# Altium PCB Coil_v3r1.PcbDoc (part 2 of 5)
Units mm, origin at the board's own origin, x right, y up, seen from the top; angles counter-clockwise.
Board outline 72 x 72 mm, 4 copper layers (Top Layer, Signal Layer 1, Signal Layer 2, Bottom Layer), stack 0.778 mm thick; 2 components, 0 nets, 15 pads, 374 vias.
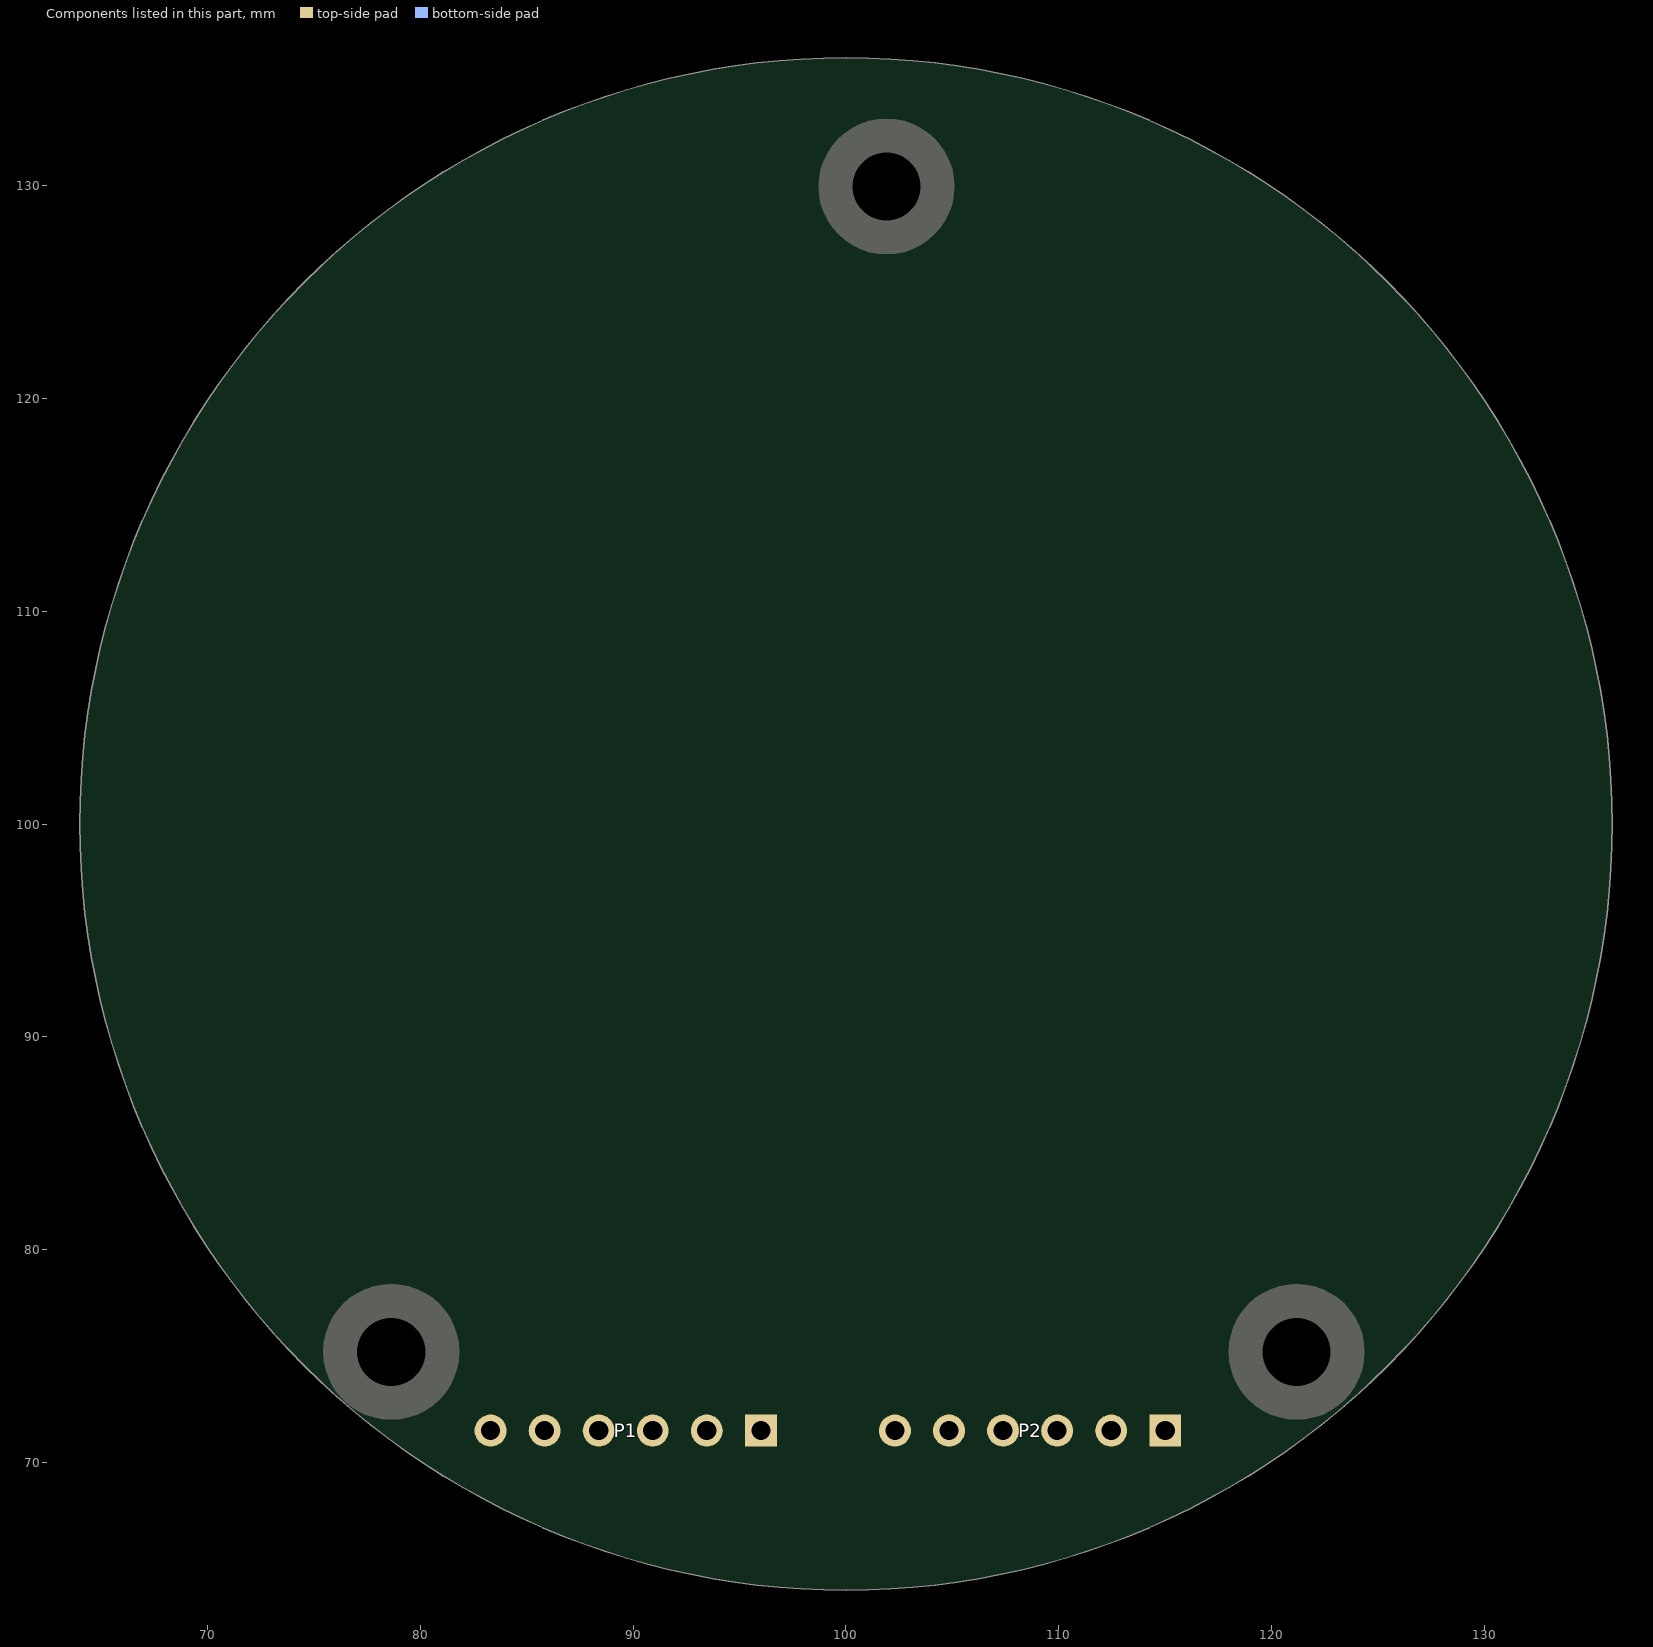
[diagram p4: the components of this part, seen from the top]

## Via types
v1: diameter 0.406, hole 0.305, Top Layer to Bottom Layer, 374 vias

## Nets (pads, with @x,y where several pads share a name; then routed paths per layer and width w, separated by ;. In a path a pad name is that pad's centre, name@x,y a point inside that pad or via, vN(x,y) a via of type N, cw(c..) or ccw(c..) an arc to the next point about the centre after c; other vN are vias at no path point) (continued)
copper on no net: (continued)
  Signal Layer 1 w0.1: v1(76.079,98.825) 76.089,98.982 76.136,99.141 76.218,99.299 76.335,99.458 76.485,99.615 76.667,99.771 76.878,99.924 77.117,100.075 77.38,100.222 77.665,100.365 77.969,100.505 78.288,100.64 78.618,100.77 78.957,100.896 79.3,101.017 79.644,101.134 79.984,101.246 80.318,101.355 80.642,101.46 80.951,101.562 81.244,101.662 81.516,101.759 81.766,101.856 81.99,101.953 82.185,102.049 82.351,102.147 82.486,102.248 82.587,102.35 82.655,102.457 v1(82.689,102.568) ; v1(76.079,101.175) 76.105,101.331 76.167,101.484 76.264,101.634 76.396,101.78 76.561,101.922 76.757,102.059 76.982,102.191 77.235,102.317 77.511,102.438 77.809,102.553 78.125,102.662 78.455,102.765 78.797,102.862 79.146,102.954 79.499,103.041 79.853,103.123 80.203,103.202 80.546,103.277 80.878,103.35 81.196,103.421 81.497,103.492 81.778,103.563 82.036,103.634 82.268,103.709 82.472,103.786 82.647,103.867 82.79,103.953 82.902,104.046 82.98,104.145 v1(83.024,104.252) ; v1(76.309,96.486) 76.304,96.643 76.335,96.806 76.401,96.972 76.502,97.141 76.636,97.312 76.802,97.485 76.997,97.658 77.22,97.832 77.468,98.004 77.737,98.175 78.026,98.343 78.33,98.508 78.646,98.671 78.97,98.829 79.3,98.983 79.631,99.133 79.959,99.278 80.28,99.419 80.592,99.555 80.89,99.687 81.172,99.815 81.433,99.939 81.672,100.06 81.885,100.178 82.07,100.293 82.226,100.407 82.35,100.52 82.441,100.632 82.498,100.745 v1(82.521,100.859) ; v1(76.309,103.514) 76.35,103.666 76.427,103.813 76.538,103.952 76.684,104.085 76.862,104.21 77.071,104.327 77.308,104.437 77.571,104.538 77.858,104.631 78.166,104.716 78.491,104.793 78.83,104.863 79.179,104.927 79.536,104.984 79.896,105.036 80.256,105.083 80.612,105.127 80.961,105.168 81.298,105.208 81.622,105.248 81.929,105.289 82.215,105.332 82.478,105.378 82.717,105.429 82.928,105.485 83.109,105.549 83.261,105.621 83.381,105.702 83.468,105.793 v1(83.523,105.896) ; v1(76.768,94.181) 76.747,94.337 76.762,94.501 76.812,94.673 76.896,94.851 77.012,95.035 77.16,95.223 77.338,95.415 77.542,95.609 77.772,95.805 78.023,96.001 78.294,96.197 78.58,96.392 78.879,96.584 79.187,96.773 79.499,96.959 79.814,97.141 80.126,97.317 80.432,97.489 80.729,97.655 81.013,97.816 81.28,97.971 81.528,98.12 81.754,98.263 81.955,98.401 82.128,98.535 82.272,98.663 82.384,98.787 82.463,98.908 82.509,99.026 v1(82.521,99.141) ; v1(76.768,105.819) 76.823,105.967 76.914,106.105 77.039,106.233 77.197,106.351 77.386,106.458 77.605,106.554 77.852,106.639 78.124,106.714 78.419,106.779 78.733,106.833 79.064,106.878 79.408,106.915 79.763,106.944 80.123,106.966 80.486,106.982 80.849,106.994 81.208,107.003 81.559,107.01 81.899,107.016 82.225,107.024 82.534,107.035 82.823,107.049 83.09,107.069 83.332,107.097 83.547,107.132 83.735,107.178 83.892,107.235 84.02,107.304 84.116,107.386 v1(84.18,107.482) ; v1(77.45,91.931) 77.414,92.085 77.413,92.25 77.446,92.426 77.511,92.612 77.609,92.806 77.738,93.008 77.896,93.216 78.081,93.429 78.29,93.646 78.521,93.866 78.771,94.088 79.037,94.309 79.316,94.53 79.603,94.749 79.896,94.964 80.191,95.176 80.484,95.382 80.772,95.583 81.051,95.778 81.318,95.965 81.569,96.145 81.802,96.318 82.012,96.483 82.198,96.64 82.358,96.79 82.488,96.932 82.588,97.067 82.655,97.195 82.689,97.316 v1(82.689,97.432) ; v1(77.45,108.069) 77.52,108.21 77.624,108.338 77.76,108.454 77.929,108.555 78.128,108.643 78.355,108.717 78.61,108.778 78.888,108.826 79.187,108.861 79.505,108.885 79.839,108.897 80.185,108.9 80.541,108.894 80.902,108.88 81.265,108.861 81.627,108.837 81.985,108.811 82.335,108.784 82.674,108.757 82.999,108.733 83.308,108.713 83.597,108.699 83.864,108.693 84.108,108.696 84.326,108.711 84.517,108.738 84.679,108.779 84.812,108.835 84.916,108.907 v1(84.99,108.997) ; v1(78.349,89.76) 78.299,89.909 78.281,90.074 78.297,90.252 78.344,90.443 78.422,90.646 78.531,90.859 78.667,91.082 78.83,91.312 79.017,91.549 79.226,91.791 79.453,92.035 79.696,92.282 79.951,92.529 80.216,92.775 80.486,93.018 80.759,93.257 81.031,93.492 81.298,93.72 81.557,93.941 81.804,94.153 82.036,94.357 82.25,94.552 82.444,94.737 82.613,94.912 82.757,95.076 82.873,95.23 82.959,95.374 83.013,95.508 83.036,95.632 v1(83.024,95.748) ; v1(78.349,110.24) 78.433,110.374 78.549,110.492 78.696,110.593 78.874,110.677 79.08,110.745 79.314,110.797 79.573,110.833 79.854,110.853 80.156,110.859 80.475,110.851 80.808,110.83 81.153,110.799 81.506,110.758 81.864,110.71 82.224,110.655 82.582,110.596 82.935,110.534 83.281,110.473 83.616,110.413 83.937,110.357 84.242,110.307 84.528,110.265 84.794,110.233 85.037,110.212 85.255,110.205 85.448,110.213 85.613,110.238 85.751,110.281 85.862,110.343 v1(85.944,110.425) ; v1(79.457,87.687) 79.392,87.831 79.359,87.993 79.357,88.171 79.385,88.366 79.443,88.576 79.53,88.799 79.644,89.034 79.784,89.279 79.947,89.533 80.13,89.794 80.332,90.06 80.55,90.329 80.78,90.6 81.019,90.87 81.265,91.139 81.513,91.404 81.76,91.664 82.004,91.917 82.239,92.162 82.464,92.398 82.675,92.624 82.87,92.839 83.044,93.041 83.196,93.232 83.323,93.41 83.423,93.574 83.494,93.726 83.536,93.865 83.545,93.991 v1(83.523,94.104) ; v1(79.457,112.313) 79.554,112.438 79.68,112.544 79.837,112.63 80.022,112.697 80.234,112.744 80.472,112.773 80.733,112.783 81.015,112.775 81.316,112.751 81.633,112.712 81.962,112.659 82.302,112.594 82.65,112.519 83.001,112.436 83.354,112.346 83.704,112.252 84.05,112.156 84.388,112.061 84.715,111.969 85.029,111.881 85.328,111.802 85.609,111.732 85.87,111.674 86.11,111.63 86.326,111.601 86.519,111.591 86.686,111.599 86.828,111.628 86.944,111.679 v1(87.033,111.752) ; v1(80.763,85.733) 80.684,85.87 80.635,86.027 80.615,86.205 80.625,86.402 80.662,86.616 80.727,86.846 80.817,87.091 80.932,87.349 81.069,87.618 81.226,87.895 81.402,88.18 81.592,88.469 81.794,88.761 82.006,89.054 82.224,89.345 82.444,89.633 82.665,89.916 82.882,90.192 83.093,90.459 83.294,90.716 83.482,90.961 83.654,91.194 83.808,91.413 83.94,91.617 84.049,91.807 84.133,91.98 84.189,92.138 84.216,92.28 84.214,92.407 v1(84.18,92.518) ; v1(80.763,114.267) 80.871,114.382 81.008,114.475 81.172,114.545 81.363,114.594 81.579,114.62 81.818,114.625 82.079,114.61 82.359,114.575 82.656,114.521 82.967,114.451 83.29,114.366 83.622,114.269 83.96,114.16 84.302,114.042 84.644,113.918 84.984,113.79 85.318,113.661 85.645,113.533 85.962,113.409 86.266,113.292 86.556,113.183 86.828,113.086 87.082,113.002 87.316,112.935 87.529,112.886 87.72,112.856 87.887,112.848 88.031,112.863 88.151,112.902 v1(88.248,112.967) ; v1(82.254,83.916) 82.163,84.044 82.098,84.196 82.061,84.371 82.051,84.568 82.067,84.785 82.109,85.021 82.175,85.273 82.264,85.541 82.374,85.822 82.503,86.114 82.65,86.414 82.81,86.72 82.983,87.031 83.165,87.343 83.354,87.654 83.545,87.962 83.737,88.265 83.926,88.561 84.11,88.848 84.284,89.123 84.447,89.386 84.596,89.634 84.727,89.867 84.839,90.084 84.929,90.283 84.995,90.464 85.036,90.626 85.049,90.77 85.034,90.896 v1(84.99,91.003) ; v1(82.254,116.084) 82.373,116.188 82.518,116.267 82.688,116.321 82.883,116.35 83.1,116.355 83.339,116.337 83.597,116.296 83.872,116.234 84.163,116.151 84.466,116.051 84.779,115.935 85.099,115.805 85.425,115.664 85.754,115.513 86.082,115.356 86.407,115.196 86.728,115.034 87.041,114.875 87.344,114.721 87.635,114.574 87.912,114.437 88.174,114.314 88.419,114.206 88.645,114.116 88.852,114.046 89.039,113.998 89.205,113.974 89.349,113.975 89.473,114.002 v1(89.575,114.056) ; 83.3,71.5 85.841,74.041 97.956,74.041 98.815,74.9 98.815,76.079 ; v1(83.916,82.254) 83.812,82.373 83.733,82.518 83.679,82.688 83.65,82.883 83.645,83.1 83.663,83.339 83.704,83.597 83.766,83.872 83.849,84.163 83.949,84.466 84.065,84.779 84.195,85.099 84.336,85.425 84.487,85.754 84.644,86.082 84.804,86.407 84.966,86.728 85.125,87.041 85.279,87.344 85.426,87.635 85.563,87.912 85.686,88.174 85.794,88.419 85.884,88.645 85.954,88.852 86.002,89.039 86.026,89.205 86.025,89.349 85.998,89.473 v1(85.944,89.575) ; v1(83.916,117.746) 84.044,117.837 84.196,117.902 84.371,117.939 84.568,117.949 84.785,117.933 85.021,117.891 85.273,117.825 85.541,117.736 85.822,117.626 86.114,117.497 86.414,117.35 86.72,117.19 87.031,117.017 87.343,116.835 87.654,116.646 87.962,116.455 88.265,116.263 88.561,116.074 88.848,115.89 89.123,115.716 89.386,115.553 89.634,115.404 89.867,115.273 90.084,115.161 90.283,115.071 90.464,115.005 90.626,114.964 90.77,114.951 90.896,114.966 v1(91.003,115.01) ; v1(85.733,80.763) 85.618,80.871 85.525,81.008 85.455,81.172 85.406,81.363 85.38,81.579 85.375,81.818 85.39,82.079 85.425,82.359 85.479,82.656 85.549,82.967 85.634,83.29 85.731,83.622 85.84,83.96 85.958,84.302 86.082,84.644 86.21,84.984 86.339,85.318 86.467,85.645 86.591,85.962 86.708,86.266 86.817,86.556 86.914,86.828 86.998,87.082 87.065,87.316 87.114,87.529 87.144,87.72 87.152,87.887 87.137,88.031 87.098,88.151 v1(87.033,88.248) ; v1(85.733,119.237) 85.87,119.316 86.027,119.365 86.205,119.385 86.402,119.375 86.616,119.338 86.846,119.273 87.091,119.183 87.349,119.068 87.618,118.931 87.895,118.774 88.18,118.598 88.469,118.408 88.761,118.206 89.054,117.994 89.345,117.776 89.633,117.556 89.916,117.335 90.192,117.118 90.459,116.907 90.716,116.706 90.961,116.518 91.194,116.346 91.413,116.192 91.617,116.06 91.807,115.951 91.98,115.867 92.138,115.811 92.28,115.784 92.407,115.786 v1(92.518,115.82) ; v1(86.269,99.28) 86.281,99.377 86.328,99.475 86.41,99.573 86.524,99.671 86.671,99.767 86.848,99.862 87.053,99.955 87.284,100.044 87.539,100.13 87.814,100.213 88.107,100.291 88.415,100.364 88.734,100.433 89.06,100.497 89.39,100.556 89.72,100.611 90.047,100.661 90.367,100.707 90.676,100.75 90.972,100.79 91.251,100.827 91.51,100.862 91.746,100.897 91.957,100.931 92.14,100.965 92.295,101.001 92.418,101.039 92.509,101.079 92.567,101.124 v1(92.592,101.173) ; v1(86.269,100.72) 86.291,100.814 86.348,100.907 86.439,100.996 86.564,101.081 86.719,101.162 86.905,101.238 87.119,101.308 87.358,101.373 87.621,101.432 87.903,101.485 88.203,101.532 88.517,101.573 88.841,101.608 89.171,101.638 89.506,101.662 89.84,101.682 90.17,101.698 90.493,101.711 90.806,101.721 91.104,101.729 91.385,101.737 91.646,101.745 91.885,101.755 92.098,101.766 92.284,101.781 92.441,101.801 92.568,101.825 92.663,101.857 92.726,101.895 v1(92.756,101.941) ; v1(86.419,97.849) 86.422,97.946 86.458,98.049 86.529,98.155 86.632,98.264 86.768,98.375 86.934,98.488 87.128,98.602 87.349,98.715 87.593,98.827 87.859,98.938 88.142,99.046 88.44,99.151 88.75,99.253 89.068,99.35 89.39,99.444 89.712,99.533 90.032,99.617 90.345,99.697 90.649,99.771 90.939,99.842 91.212,99.908 91.466,99.97 91.697,100.029 91.904,100.085 92.083,100.138 92.232,100.19 92.351,100.24 92.437,100.291 92.491,100.341 v1(92.51,100.393) ; v1(86.419,102.151) 86.452,102.243 86.518,102.329 86.618,102.408 86.75,102.48 86.914,102.544 87.106,102.6 87.326,102.648 87.571,102.687 87.838,102.718 88.125,102.742 88.428,102.757 88.744,102.765 89.07,102.766 89.402,102.761 89.737,102.75 90.071,102.735 90.402,102.716 90.724,102.695 91.036,102.672 91.333,102.65 91.614,102.628 91.875,102.609 92.113,102.593 92.326,102.583 92.513,102.578 92.671,102.581 92.799,102.592 92.897,102.613 92.964,102.645 v1(92.998,102.688) ; v1(86.719,96.441) 86.711,96.538 86.736,96.644 86.795,96.757 86.887,96.876 87.01,97.001 87.164,97.131 87.345,97.264 87.553,97.4 87.784,97.537 88.036,97.675 88.307,97.812 88.593,97.947 88.89,98.081 89.195,98.211 89.506,98.338 89.817,98.46 90.127,98.577 90.43,98.689 90.724,98.795 91.005,98.896 91.27,98.99 91.516,99.078 91.74,99.161 91.939,99.238 92.111,99.31 92.255,99.377 92.368,99.44 92.448,99.498 92.496,99.554 v1(92.51,99.607) ; v1(86.719,103.559) 86.76,103.647 86.835,103.725 86.943,103.793 87.082,103.851 87.251,103.898 87.449,103.933 87.672,103.958 87.92,103.972 88.189,103.975 88.476,103.968 88.779,103.951 89.095,103.926 89.419,103.893 89.749,103.853 90.081,103.808 90.412,103.758 90.738,103.704 91.057,103.65 91.364,103.595 91.658,103.541 91.935,103.49 92.192,103.444 92.427,103.403 92.638,103.371 92.823,103.347 92.981,103.333 93.11,103.331 93.209,103.341 93.279,103.366 v1(93.317,103.405) ; v1(87.163,95.072) 87.145,95.168 87.16,95.276 87.207,95.394 87.286,95.523 87.395,95.66 87.534,95.805 87.7,95.956 87.893,96.113 88.108,96.273 88.345,96.437 88.6,96.601 88.87,96.766 89.151,96.93 89.442,97.092 89.737,97.25 90.034,97.404 90.33,97.553 90.62,97.696 90.901,97.832 91.17,97.961 91.423,98.083 91.659,98.197 91.873,98.302 92.063,98.4 92.227,98.489 92.362,98.571 92.468,98.645 92.542,98.712 92.584,98.772 v1(92.592,98.827) ; v1(87.163,104.928) 87.214,105.011 87.297,105.081 87.411,105.138 87.555,105.18 87.728,105.209 87.929,105.224 88.154,105.225 88.401,105.213 88.669,105.188 88.954,105.151 89.254,105.103 89.565,105.045 89.884,104.978 90.208,104.904 90.533,104.824 90.857,104.739 91.176,104.652 91.487,104.565 91.787,104.478 92.074,104.394 92.344,104.314 92.595,104.241 92.824,104.176 93.031,104.122 93.212,104.078 93.368,104.048 93.496,104.033 93.596,104.033 93.667,104.05 v1(93.71,104.085) ; v1(87.687,79.457) 87.562,79.554 87.456,79.68 87.37,79.837 87.303,80.022 87.256,80.234 87.227,80.472 87.217,80.733 87.225,81.015 87.249,81.316 87.288,81.633 87.341,81.962 87.406,82.302 87.481,82.65 87.564,83.001 87.654,83.354 87.748,83.704 87.844,84.05 87.939,84.388 88.031,84.715 88.119,85.029 88.198,85.328 88.268,85.609 88.326,85.87 88.37,86.11 88.399,86.326 88.409,86.519 88.401,86.686 88.372,86.828 88.321,86.944 v1(88.248,87.033) ; v1(87.687,120.543) 87.831,120.608 87.993,120.641 88.171,120.643 88.366,120.615 88.576,120.557 88.799,120.47 89.034,120.356 89.279,120.216 89.533,120.053 89.794,119.87 90.06,119.668 90.329,119.45 90.6,119.22 90.87,118.981 91.139,118.735 91.404,118.487 91.664,118.24 91.917,117.996 92.162,117.761 92.398,117.536 92.624,117.325 92.839,117.13 93.041,116.956 93.232,116.804 93.41,116.677 93.574,116.577 93.726,116.506 93.865,116.464 93.991,116.455 v1(94.104,116.477) ; v1(87.749,93.758) 87.721,93.851 87.724,93.959 87.758,94.082 87.823,94.218 87.918,94.366 88.041,94.525 88.19,94.693 88.365,94.869 88.563,95.051 88.781,95.238 89.017,95.428 89.269,95.621 89.532,95.813 89.803,96.004 90.081,96.192 90.36,96.377 90.638,96.556 90.912,96.728 91.177,96.893 91.431,97.05 91.671,97.197 91.893,97.335 92.095,97.462 92.274,97.579 92.427,97.685 92.554,97.78 92.651,97.865 92.718,97.939 92.753,98.004 v1(92.756,98.059) ; v1(87.749,106.242) 87.808,106.32 87.897,106.381 88.017,106.425 88.165,106.453 88.34,106.463 88.541,106.457 88.765,106.434 89.01,106.396 89.274,106.344 89.553,106.277 89.846,106.198 90.149,106.108 90.459,106.008 90.774,105.9 91.089,105.787 91.402,105.669 91.711,105.549 92.011,105.429 92.3,105.312 92.576,105.198 92.837,105.091 93.078,104.992 93.3,104.904 93.5,104.828 93.676,104.766 93.827,104.719 93.953,104.691 94.052,104.68 94.125,104.69 v1(94.171,104.72) ; v1(88.468,92.511) 88.431,92.601 88.423,92.709 88.444,92.835 88.494,92.977 88.573,93.134 88.679,93.304 88.81,93.487 88.965,93.68 89.143,93.882 89.341,94.091 89.555,94.305 89.785,94.523 90.027,94.742 90.277,94.96 90.533,95.176 90.792,95.389 91.05,95.596 91.304,95.796 91.55,95.988 91.787,96.17 92.009,96.342 92.216,96.502 92.403,96.649 92.569,96.784 92.711,96.906 92.826,97.014 92.914,97.108 92.973,97.189 93.001,97.257 v1(92.998,97.312) ; v1(88.468,107.489) 88.535,107.56 88.631,107.611 88.754,107.643 88.904,107.654 89.08,107.647 89.278,107.619 89.499,107.574 89.739,107.51 89.995,107.43 90.267,107.335 90.55,107.225 90.842,107.104 91.14,106.972 91.441,106.833 91.743,106.687 92.042,106.537 92.336,106.385 92.622,106.235 92.898,106.087 93.16,105.946 93.408,105.812 93.638,105.688 93.849,105.577 94.04,105.481 94.209,105.401 94.354,105.339 94.476,105.297 94.574,105.276 94.648,105.278 v1(94.697,105.303) ; v1(89.314,91.347) 89.267,91.432 89.248,91.539 89.256,91.666 89.291,91.813 89.353,91.977 89.44,92.158 89.552,92.353 89.686,92.562 89.842,92.781 90.017,93.01 90.208,93.245 90.414,93.485 90.631,93.728 90.857,93.971 91.089,94.213 91.324,94.452 91.559,94.684 91.791,94.91 92.016,95.127 92.232,95.332 92.436,95.526 92.624,95.707 92.795,95.874 92.946,96.025 93.074,96.161 93.178,96.28 93.255,96.384 93.305,96.47 93.326,96.541 v1(93.317,96.595) ; v1(89.314,108.653) 89.388,108.717 89.489,108.758 89.615,108.776 89.765,108.772 89.939,108.746 90.134,108.698 90.348,108.63 90.58,108.542 90.827,108.435 91.087,108.312 91.357,108.174 91.634,108.022 91.917,107.86 92.202,107.69 92.487,107.513 92.769,107.333 93.046,107.151 93.314,106.972 93.573,106.796 93.819,106.628 94.051,106.469 94.268,106.322 94.466,106.189 94.645,106.074 94.805,105.976 94.943,105.9 95.06,105.845 95.155,105.815 95.229,105.809 v1(95.28,105.829) ; v1(89.575,85.944) 89.657,85.862 89.719,85.751 89.762,85.613 89.787,85.448 89.795,85.255 89.788,85.037 89.767,84.794 89.735,84.528 89.693,84.242 89.643,83.937 89.587,83.616 89.527,83.281 89.466,82.935 89.404,82.582 89.345,82.224 89.29,81.864 89.242,81.506 89.201,81.153 89.17,80.808 89.149,80.475 89.141,80.156 89.147,79.854 89.167,79.573 89.203,79.314 89.255,79.08 89.323,78.874 89.407,78.696 89.508,78.549 89.626,78.433 v1(89.76,78.349) ; v1(89.76,121.651) 89.909,121.701 90.074,121.719 90.252,121.703 90.443,121.656 90.646,121.578 90.859,121.469 91.082,121.333 91.312,121.17 91.549,120.983 91.791,120.774 92.035,120.547 92.282,120.304 92.529,120.049 92.775,119.784 93.018,119.513 93.257,119.241 93.492,118.969 93.72,118.702 93.941,118.443 94.153,118.196 94.357,117.964 94.552,117.75 94.737,117.556 94.912,117.387 95.076,117.243 95.23,117.127 95.374,117.041 95.508,116.987 95.632,116.964 v1(95.748,116.976) ; v1(90.277,90.277) 90.222,90.357 90.191,90.462 90.186,90.589 90.206,90.738 90.25,90.908 90.318,91.097 90.409,91.303 90.521,91.524 90.652,91.759 90.802,92.004 90.968,92.258 91.147,92.519 91.338,92.783 91.537,93.049 91.743,93.313 91.952,93.575 92.161,93.831 92.368,94.08 92.569,94.319 92.762,94.546 92.945,94.76 93.113,94.96 93.266,95.143 93.4,95.31 93.513,95.458 93.604,95.588 93.67,95.698 93.711,95.79 93.724,95.862 v1(93.71,95.915) ; v1(90.277,109.723) 90.357,109.778 90.462,109.809 90.589,109.814 90.738,109.794 90.908,109.75 91.097,109.682 91.303,109.591 91.524,109.479 91.759,109.348 92.004,109.198 92.258,109.032 92.519,108.853 92.783,108.662 93.049,108.463 93.313,108.257 93.575,108.048 93.831,107.839 94.08,107.632 94.319,107.431 94.546,107.238 94.76,107.055 94.96,106.887 95.143,106.734 95.31,106.6 95.458,106.487 95.588,106.396 95.698,106.33 95.79,106.289 95.862,106.276 v1(95.915,106.29) ; 90.92,71.5 92.57,69.85 97.949,69.85 101.185,73.086 101.185,76.079 ; v1(91.003,84.99) 91.093,84.916 91.165,84.812 91.221,84.679 91.262,84.517 91.289,84.326 91.304,84.108 91.307,83.864 91.301,83.597 91.287,83.308 91.267,82.999 91.243,82.674 91.216,82.335 91.189,81.985 91.163,81.627 91.139,81.265 91.12,80.902 91.106,80.541 91.1,80.185 91.103,79.839 91.115,79.505 91.139,79.187 91.174,78.888 91.222,78.61 91.283,78.355 91.357,78.128 91.445,77.929 91.546,77.76 91.662,77.624 91.79,77.52 v1(91.931,77.45) ; v1(91.347,89.314) 91.283,89.388 91.242,89.489 91.224,89.615 91.228,89.765 91.254,89.939 91.302,90.134 91.37,90.348 91.458,90.58 91.565,90.827 91.688,91.087 91.826,91.357 91.978,91.634 92.14,91.917 92.31,92.202 92.487,92.487 92.667,92.769 92.849,93.046 93.028,93.314 93.204,93.573 93.372,93.819 93.531,94.051 93.678,94.268 93.811,94.466 93.926,94.645 94.024,94.805 94.1,94.943 94.155,95.06 94.185,95.155 94.191,95.229 v1(94.171,95.28) ; v1(91.347,110.686) 91.432,110.733 91.539,110.752 91.666,110.744 91.813,110.709 91.977,110.647 92.158,110.56 92.353,110.448 92.562,110.314 92.781,110.158 93.01,109.983 93.245,109.792 93.485,109.586 93.728,109.369 93.971,109.143 94.213,108.911 94.452,108.676 94.684,108.441 94.91,108.209 95.127,107.984 95.332,107.768 95.526,107.564 95.707,107.376 95.874,107.205 96.025,107.054 96.161,106.926 96.28,106.822 96.384,106.745 96.47,106.695 96.541,106.674 v1(96.595,106.683) ; v1(91.931,122.55) 92.085,122.586 92.25,122.587 92.426,122.554 92.612,122.489 92.806,122.391 93.008,122.262 93.216,122.104 93.429,121.919 93.646,121.71 93.866,121.479 94.088,121.229 94.309,120.963 94.53,120.684 94.749,120.397 94.964,120.104 95.176,119.809 95.382,119.516 95.583,119.228 95.778,118.949 95.965,118.682 96.145,118.431 96.318,118.198 96.483,117.988 96.64,117.802 96.79,117.642 96.932,117.512 97.067,117.412 97.195,117.345 97.316,117.311 v1(97.432,117.311) ; v1(92.511,88.468) 92.44,88.535 92.389,88.631 92.357,88.754 92.346,88.904 92.353,89.08 92.381,89.278 92.426,89.499 92.49,89.739 92.57,89.995 92.665,90.267 92.775,90.55 92.896,90.842 93.028,91.14 93.167,91.441 93.313,91.743 93.463,92.042 93.615,92.336 93.765,92.622 93.913,92.898 94.054,93.16 94.188,93.408 94.312,93.638 94.423,93.849 94.519,94.04 94.599,94.209 94.661,94.354 94.703,94.476 94.724,94.574 94.722,94.648 v1(94.697,94.697) ; v1(92.511,111.532) 92.601,111.569 92.709,111.577 92.835,111.556 92.977,111.506 93.134,111.427 93.304,111.321 93.487,111.19 93.68,111.035 93.882,110.857 94.091,110.659 94.305,110.445 94.523,110.215 94.742,109.973 94.96,109.723 95.176,109.467 95.389,109.208 95.596,108.95 95.796,108.696 95.988,108.45 96.17,108.213 96.342,107.991 96.502,107.784 96.649,107.597 96.784,107.431 96.906,107.289 97.014,107.174 97.108,107.086 97.189,107.027 97.257,106.999 v1(97.312,107.002) ; v1(92.518,84.18) 92.614,84.116 92.696,84.02 92.765,83.892 92.822,83.735 92.868,83.547 92.903,83.332 92.931,83.09 92.951,82.823 92.965,82.534 92.976,82.225 92.984,81.899 92.99,81.559 92.997,81.208 93.006,80.849 93.018,80.486 93.034,80.123 93.056,79.763 93.085,79.408 93.122,79.064 93.167,78.733 93.221,78.419 93.286,78.124 93.361,77.852 93.446,77.605 93.542,77.386 93.649,77.197 93.767,77.039 93.895,76.914 94.033,76.823 v1(94.181,76.768) ; v1(93.758,87.749) 93.68,87.808 93.619,87.897 93.575,88.017 93.547,88.165 93.537,88.34 93.543,88.541 93.566,88.765 93.604,89.01 93.656,89.274 93.723,89.553 93.802,89.846 93.892,90.149 93.992,90.459 94.1,90.774 94.213,91.089 94.331,91.402 94.451,91.711 94.571,92.011 94.688,92.3 94.802,92.576 94.909,92.837 95.008,93.078 95.096,93.3 95.172,93.5 95.234,93.676 95.281,93.827 95.309,93.953 95.32,94.052 95.31,94.125 v1(95.28,94.171) ; v1(93.758,112.251) 93.851,112.279 93.959,112.276 94.082,112.242 94.218,112.177 94.366,112.082 94.525,111.959 94.693,111.81 94.869,111.635 95.051,111.437 95.238,111.219 95.428,110.983 95.621,110.731 95.813,110.468 96.004,110.197 96.192,109.919 96.377,109.64 96.556,109.362 96.728,109.088 96.893,108.823 97.05,108.569 97.197,108.329 97.335,108.107 97.462,107.905 97.579,107.726 97.685,107.573 97.78,107.446 97.865,107.349 97.939,107.282 98.004,107.247 v1(98.059,107.244) ; v1(94.104,83.523) 94.207,83.468 94.298,83.381 94.379,83.261 94.451,83.109 94.515,82.928 94.571,82.717 94.622,82.478 94.668,82.215 94.711,81.929 94.752,81.622 94.792,81.298 94.832,80.961 94.873,80.612 94.917,80.256 94.964,79.896 95.016,79.536 95.073,79.179 95.137,78.83 95.207,78.491 95.284,78.166 95.369,77.858 95.462,77.571 95.563,77.308 95.673,77.071 95.79,76.862 95.915,76.684 96.048,76.538 96.187,76.427 96.334,76.35 v1(96.486,76.309) ; v1(94.181,123.232) 94.337,123.253 94.501,123.238 94.673,123.188 94.851,123.104 95.035,122.988 95.223,122.84 95.415,122.662 95.609,122.458 95.805,122.228 96.001,121.977 96.197,121.706 96.392,121.42 96.584,121.121 96.773,120.813 96.959,120.501 97.141,120.186 97.317,119.874 97.489,119.568 97.655,119.271 97.816,118.987 97.971,118.72 98.12,118.472 98.263,118.246 98.401,118.045 98.535,117.872 98.663,117.728 98.787,117.616 98.908,117.537 99.026,117.491 v1(99.141,117.479) ; v1(95.072,87.163) 94.989,87.214 94.919,87.297 94.862,87.411 94.82,87.555 94.791,87.728 94.776,87.929 94.775,88.154 94.787,88.401 94.812,88.669 94.849,88.954 94.897,89.254 94.955,89.565 95.022,89.884 95.096,90.208 95.176,90.533 95.261,90.857 95.348,91.176 95.435,91.487 95.522,91.787 95.606,92.074 95.686,92.344 95.759,92.595 95.824,92.824 95.878,93.031 95.922,93.212 95.952,93.368 95.967,93.496 95.967,93.596 95.95,93.667 v1(95.915,93.71) ; v1(95.072,112.837) 95.168,112.855 95.276,112.84 95.394,112.793 95.523,112.714 95.66,112.605 95.805,112.466 95.956,112.3 96.113,112.107 96.273,111.892 96.437,111.655 96.601,111.4 96.766,111.13 96.93,110.849 97.092,110.558 97.25,110.263 97.404,109.966 97.553,109.67 97.696,109.38 97.832,109.099 97.961,108.83 98.083,108.577 98.197,108.341 98.302,108.127 98.4,107.937 98.489,107.773 98.571,107.638 98.645,107.532 98.712,107.458 98.772,107.416 v1(98.827,107.408) ; v1(95.748,83.024) 95.855,82.98 95.954,82.902 96.047,82.79 96.133,82.647 96.214,82.472 96.291,82.268 96.366,82.036 96.437,81.778 96.508,81.497 96.579,81.196 96.65,80.878 96.723,80.546 96.798,80.203 96.877,79.853 96.959,79.499 97.046,79.146 97.138,78.797 97.235,78.455 97.338,78.125 97.447,77.809 97.562,77.511 97.683,77.235 97.809,76.982 97.941,76.757 98.078,76.561 98.22,76.396 98.366,76.264 98.516,76.167 98.669,76.105 98.825,76.079 ; v1(96.441,86.719) 96.353,86.76 96.275,86.835 96.207,86.943 96.149,87.082 96.102,87.251 96.067,87.449 96.042,87.672 96.028,87.92 96.025,88.189 96.032,88.476 96.049,88.779 96.074,89.095 96.107,89.419 96.147,89.749 96.192,90.081 96.242,90.412 96.296,90.738 96.35,91.057 96.405,91.364 96.459,91.658 96.51,91.935 96.556,92.192 96.597,92.427 96.629,92.638 96.653,92.823 96.667,92.981 96.669,93.11 96.659,93.209 96.634,93.279 v1(96.595,93.317) ; v1(96.441,113.281) 96.538,113.289 96.644,113.264 96.757,113.205 96.876,113.113 97.001,112.99 97.131,112.836 97.264,112.655 97.4,112.447 97.537,112.216 97.675,111.964 97.812,111.693 97.947,111.407 98.081,111.11 98.211,110.805 98.338,110.494 98.46,110.183 98.577,109.873 98.689,109.57 98.795,109.276 98.896,108.995 98.99,108.73 99.078,108.484 99.161,108.26 99.238,108.061 99.31,107.889 99.377,107.745 99.44,107.632 99.498,107.552 99.554,107.504 v1(99.607,107.49) ; v1(96.486,123.691) 96.643,123.696 96.806,123.665 96.972,123.599 97.141,123.498 97.312,123.364 97.485,123.198 97.658,123.003 97.832,122.78 98.004,122.532 98.175,122.263 98.343,121.974 98.508,121.67 98.671,121.354 98.829,121.03 98.983,120.7 99.133,120.369 99.278,120.041 99.419,119.72 99.555,119.408 99.687,119.11 99.815,118.828 99.939,118.567 100.06,118.328 100.178,118.115 100.293,117.93 100.407,117.774 100.52,117.65 100.632,117.559 100.745,117.502 v1(100.859,117.479) ; v1(97.312,92.998) 97.355,92.964 97.387,92.897 97.408,92.799 97.419,92.671 97.422,92.513 97.417,92.326 97.407,92.113 97.391,91.875 97.372,91.614 97.35,91.333 97.328,91.036 97.305,90.724 97.284,90.402 97.265,90.071 97.25,89.737 97.239,89.402 97.234,89.07 97.235,88.744 97.243,88.428 97.258,88.125 97.282,87.838 97.313,87.571 97.352,87.326 97.4,87.106 97.456,86.914 97.52,86.75 97.592,86.618 97.671,86.518 97.757,86.452 v1(97.849,86.419) ; v1(97.432,82.689) 97.543,82.655 97.65,82.587 97.752,82.486 97.853,82.351 97.951,82.185 98.047,81.99 98.144,81.766 98.241,81.516 98.338,81.244 98.438,80.951 98.54,80.642 98.645,80.318 98.754,79.984 98.866,79.644 98.983,79.3 99.104,78.957 99.23,78.618 99.36,78.288 99.495,77.969 99.635,77.665 99.778,77.38 99.925,77.117 100.076,76.878 100.229,76.667 100.385,76.485 100.542,76.335 100.701,76.218 100.859,76.136 101.018,76.089 101.175,76.079 ; v1(97.849,113.581) 97.946,113.578 98.049,113.542 98.155,113.471 98.264,113.368 98.375,113.232 98.488,113.066 98.602,112.872 98.715,112.651 98.827,112.407 98.938,112.141 99.046,111.858 99.151,111.56 99.253,111.25 99.35,110.932 99.444,110.61 99.533,110.288 99.617,109.968 99.697,109.655 99.771,109.351 99.842,109.061 99.908,108.788 99.97,108.534 100.029,108.303 100.085,108.096 100.138,107.917 100.19,107.768 100.24,107.649 100.291,107.563 100.341,107.509 v1(100.393,107.49) ; v1(98.059,92.756) 98.105,92.726 98.143,92.663 98.175,92.568 98.199,92.441 98.219,92.284 98.234,92.098 98.245,91.885 98.255,91.646 98.263,91.385 98.271,91.104 98.279,90.806 98.289,90.493 98.302,90.17 98.318,89.84 98.338,89.506 98.362,89.171 98.392,88.841 98.427,88.517 98.468,88.203 98.515,87.903 98.568,87.621 98.627,87.358 98.692,87.119 98.762,86.905 98.838,86.719 98.919,86.564 99.004,86.439 99.093,86.348 99.186,86.291 99.28,86.269 ; v1@98.815,124.121 98.88,124.121 98.945,124.115 99.011,124.102 99.077,124.083 99.142,124.058 99.208,124.027 ; v1(98.825,123.921) 98.889,123.921 98.954,123.915 99.019,123.903 99.084,123.885 99.149,123.86 99.215,123.83 99.28,123.794 99.345,123.752 99.41,123.704 99.475,123.65 99.54,123.591 99.605,123.526 99.669,123.456 99.733,123.38 99.797,123.3 99.86,123.214 99.923,123.124 99.985,123.029 100.047,122.93 100.108,122.826 100.169,122.719 100.229,122.607 100.288,122.492 100.347,122.374 100.405,122.252 100.462,122.127 100.518,122 100.574,121.87 100.629,121.737 100.684,121.603 v1(100.627,119.826) ; v1(98.827,92.592) 98.876,92.567 98.921,92.509 98.961,92.418 98.999,92.295 99.035,92.14 99.069,91.957 99.103,91.746 99.138,91.51 99.173,91.251 99.21,90.972 99.25,90.676 99.293,90.367 99.339,90.047 99.389,89.72 99.444,89.39 99.503,89.06 99.567,88.734 99.636,88.415 99.709,88.107 99.787,87.814 99.87,87.539 99.956,87.284 100.045,87.053 100.138,86.848 100.233,86.671 100.329,86.524 100.427,86.41 100.525,86.328 100.623,86.281 100.72,86.269 100.741,85.869 ccw(c102.04,85.869) 102.04,84.57 ccw(c103.19,84.57) 102.377,83.757 109.374,76.76 ccw(c110.706,78.091) 110.706,76.208 cw(c110.706,75.107) 111.485,75.885 113.58,75.885 116.622,72.843 116.622,70.254 116.367,70 110.073,70 109.92,70.153 109.92,71.5 ; v1(99.141,82.521) 99.255,82.498 99.368,82.441 99.48,82.35 99.593,82.226 99.707,82.07 99.822,81.885 99.94,81.672 100.061,81.433 100.185,81.172 100.313,80.89 100.445,80.592 100.581,80.28 100.722,79.959 100.867,79.631 101.017,79.3 101.171,78.97 101.329,78.646 101.492,78.33 101.657,78.026 101.825,77.737 101.996,77.468 102.168,77.22 102.342,76.997 102.515,76.802 102.688,76.636 102.859,76.502 103.028,76.401 103.194,76.335 103.357,76.304 v1(103.514,76.309) ; 99.259,86.269 99.259,83.437 ccw(c99.782,83.437) 99.782,82.915 100.741,81.174 102.686,77.438 104.879,75.6 104.879,74.573 102.3,71.993 102.3,71.5 ; v1(99.28,113.731) 99.32,113.73 99.361,113.723 99.401,113.71 99.442,113.691 99.483,113.666 99.524,113.635 99.565,113.598 99.606,113.556 99.646,113.507 99.687,113.454 99.727,113.394 99.767,113.329 99.807,113.259 99.847,113.184 99.886,113.104 99.924,113.019 99.962,112.929 100,112.835 100.037,112.736 100.074,112.633 100.109,112.527 100.144,112.417 100.179,112.303 100.213,112.186 100.246,112.065 100.278,111.942 100.309,111.817 100.34,111.689 100.37,111.559 v1(100.399,111.427) ; v1(99.607,92.51) 99.659,92.491 99.709,92.437 99.76,92.351 99.81,92.232 99.862,92.083 99.915,91.904 99.971,91.697 100.03,91.466 100.092,91.212 100.158,90.939 100.229,90.649 100.303,90.345 100.383,90.032 100.467,89.712 100.556,89.39 100.65,89.068 100.747,88.75 100.849,88.44 100.954,88.142 101.062,87.859 101.173,87.593 101.285,87.349 101.398,87.128 101.512,86.934 101.625,86.768 101.736,86.632 101.845,86.529 101.951,86.458 102.054,86.422 v1(102.151,86.419) ; v1(100.06,83.222) 100.408,82.461 102.872,77.828 105.094,75.879 105.289,75.684 105.289,73.684 104.84,73.235 104.84,71.5 ; v1(100.393,92.51) 100.446,92.496 100.502,92.448 100.56,92.368 100.623,92.255 100.69,92.111 100.762,91.939 100.839,91.74 100.922,91.516 101.01,91.27 101.104,91.005 101.205,90.724 101.311,90.43 101.423,90.127 101.54,89.817 101.662,89.506 101.789,89.195 101.919,88.89 102.053,88.593 102.188,88.307 102.325,88.036 102.463,87.784 102.6,87.553 102.736,87.345 102.869,87.164 102.999,87.01 103.124,86.887 103.243,86.795 103.356,86.736 103.462,86.711 v1(103.559,86.719) ; v1(100.685,109.792) 100.704,109.66 100.722,109.529 100.74,109.4 100.757,109.273 100.774,109.149 100.79,109.028 100.806,108.91 100.821,108.794 100.836,108.682 100.851,108.574 100.865,108.47 100.88,108.369 100.894,108.273 100.908,108.181 100.922,108.093 100.936,108.011 100.951,107.933 100.965,107.86 100.98,107.792 100.995,107.729 101.01,107.672 101.026,107.62 101.042,107.573 101.059,107.532 101.076,107.497 101.094,107.468 101.113,107.444 101.132,107.426 101.152,107.414 v1(101.173,107.408) ; v1(100.72,113.731) 100.759,113.726 100.799,113.715 100.838,113.698 100.876,113.674 100.914,113.645 100.952,113.61 100.989,113.569 101.025,113.523 101.06,113.47 101.095,113.413 101.129,113.349 101.162,113.281 101.194,113.207 101.226,113.128 101.256,113.044 101.285,112.955 101.314,112.862 101.342,112.764 101.368,112.663 101.394,112.557 101.418,112.447 101.442,112.333 101.464,112.217 101.485,112.097 101.506,111.974 101.525,111.848 101.543,111.72 101.56,111.589 101.576,111.457 v1(101.591,111.323) ; v1(100.859,82.521) 100.974,82.509 101.092,82.463 101.213,82.384 101.337,82.272 101.465,82.128 101.599,81.955 101.737,81.754 101.88,81.528 102.029,81.28 102.184,81.013 102.345,80.729 102.511,80.432 102.683,80.126 102.859,79.814 103.041,79.499 103.227,79.187 103.416,78.879 103.608,78.58 103.803,78.294 103.999,78.023 104.195,77.772 104.391,77.542 104.585,77.338 104.777,77.16 104.965,77.012 105.149,76.896 105.327,76.812 105.499,76.762 105.663,76.747 v1(105.819,76.768) ; v1@101,84 ccw(c103.237,84) 101.655,82.418 102.716,81.358 108.762,74 109.078,73.684 111.643,73.684 112.46,72.867 112.46,71.5 ; v1(101.173,92.592) 101.228,92.584 101.288,92.542 101.355,92.468 101.429,92.362 101.511,92.227 101.6,92.063 101.698,91.873 101.803,91.659 101.917,91.423 102.039,91.17 102.168,90.901 102.304,90.62 102.447,90.33 102.596,90.034 102.75,89.737 102.908,89.442 103.07,89.151 103.234,88.87 103.399,88.6 103.563,88.345 103.727,88.108 103.887,87.893 104.044,87.7 104.195,87.534 104.34,87.395 104.477,87.286 104.606,87.207 104.724,87.16 104.832,87.145 v1(104.928,87.163) ; v1(101.175,123.921) 101.239,123.915 101.303,123.903 101.367,123.884 101.43,123.86 101.492,123.829 101.554,123.792 101.616,123.75 101.676,123.701 101.737,123.647 101.796,123.587 101.855,123.522 101.913,123.451 101.97,123.375 102.026,123.294 102.081,123.207 102.136,123.116 102.19,123.02 102.242,122.92 102.294,122.815 102.345,122.706 102.395,122.593 102.443,122.476 102.491,122.356 102.538,122.232 102.584,122.105 102.629,121.975 102.672,121.843 102.715,121.708 102.757,121.571 102.798,121.432 v1(102.568,119.669) ; v1@101.185,124.121 101.25,124.115 101.314,124.102 101.378,124.083 101.442,124.058 101.505,124.026 ; v1(101.437,121.566) 101.319,119.792 101.363,119.656 101.407,119.522 101.449,119.39 101.492,119.26 101.534,119.133 101.575,119.008 101.616,118.887 101.657,118.769 101.698,118.654 101.738,118.542 101.778,118.435 101.818,118.331 101.857,118.231 101.897,118.136 101.937,118.046 101.976,117.96 102.016,117.879 102.056,117.803 102.096,117.731 102.136,117.666 102.177,117.605 102.218,117.55 102.26,117.5 102.302,117.456 102.345,117.417 102.388,117.384 102.432,117.357 102.476,117.336 102.522,117.32 v1(102.568,117.311) ; v1(101.705,109.667) 101.71,109.533 101.714,109.401 101.718,109.271 101.722,109.144 101.726,109.018 101.729,108.896 101.733,108.777 101.736,108.66 101.739,108.548 101.742,108.438 101.746,108.333 101.75,108.231 101.754,108.134 101.758,108.041 101.763,107.953 101.769,107.869 101.775,107.79 101.781,107.716 101.789,107.647 101.797,107.583 101.806,107.524 101.817,107.471 101.828,107.423 101.84,107.381 101.854,107.344 101.868,107.313 101.885,107.287 101.902,107.267 101.921,107.253 v1(101.941,107.244) ; v1(101.73,83.523) ccw(c103.585,83.523) 102.274,82.211 103.031,81.454 109.308,74 112.5,74 115,71.5 ; v1(101.941,92.756) 101.996,92.753 102.061,92.718 102.135,92.651 102.22,92.554 102.315,92.427 102.421,92.274 102.538,92.095 102.665,91.893 102.803,91.671 102.95,91.431 103.107,91.177 103.272,90.912 103.444,90.638 103.623,90.36 103.808,90.081 103.996,89.803 104.187,89.532 104.379,89.269 104.572,89.017 104.762,88.781 104.949,88.563 105.131,88.365 105.307,88.19 105.475,88.041 105.634,87.918 105.782,87.823 105.918,87.758 106.041,87.724 106.149,87.721 v1(106.242,87.749) ; v1(102.151,113.581) 102.243,113.548 102.329,113.482 102.408,113.382 102.48,113.25 102.544,113.086 102.6,112.894 102.648,112.674 102.687,112.429 102.718,112.162 102.742,111.875 102.757,111.572 102.765,111.256 102.766,110.93 102.761,110.598 102.75,110.263 102.735,109.929 102.716,109.598 102.695,109.276 102.672,108.964 102.65,108.667 102.628,108.386 102.609,108.125 102.593,107.887 102.583,107.674 102.578,107.487 102.581,107.329 102.592,107.201 102.613,107.103 102.645,107.036 v1(102.688,107.002) ; v1(102.568,82.689) 102.684,82.689 102.805,82.655 102.933,82.588 103.068,82.488 103.21,82.358 103.36,82.198 103.517,82.012 103.682,81.802 103.855,81.569 104.035,81.318 104.222,81.051 104.417,80.772 104.618,80.484 104.824,80.191 105.036,79.896 105.251,79.603 105.47,79.316 105.691,79.037 105.912,78.771 106.134,78.521 106.354,78.29 106.571,78.081 106.784,77.896 106.992,77.738 107.194,77.609 107.388,77.511 107.574,77.446 107.75,77.413 107.915,77.414 v1(108.069,77.45) ; v1(102.688,92.998) 102.743,93.001 102.811,92.973 102.892,92.914 102.986,92.826 103.094,92.711 103.216,92.569 103.351,92.403 103.498,92.216 103.658,92.009 103.83,91.787 104.012,91.55 104.204,91.304 104.404,91.05 104.611,90.792 104.824,90.533 105.04,90.277 105.258,90.027 105.477,89.785 105.695,89.555 105.909,89.341 106.118,89.143 106.32,88.965 106.513,88.81 106.696,88.679 106.866,88.573 107.023,88.494 107.165,88.444 107.291,88.423 107.399,88.431 v1(107.489,88.468) ; v1(102.895,84.568) ccw(c104.897,84.568) 103.482,83.153 109.337,77.297 ccw(c111.133,79.094) 111.133,76.554 cw(c111.133,75.443) 111.918,76.228 113.835,76.228 117,73.063 117,70.101 116.368,69.469 109.243,69.469 107.38,71.332 107.38,71.5 ; v1(103.405,93.317) 103.459,93.326 103.53,93.305 103.616,93.255 103.72,93.178 103.839,93.074 103.975,92.946 104.126,92.795 104.293,92.624 104.474,92.436 104.668,92.232 104.873,92.016 105.09,91.791 105.316,91.559 105.548,91.324 105.787,91.089 106.029,90.857 106.272,90.631 106.515,90.414 106.755,90.208 106.99,90.017 107.219,89.842 107.438,89.686 107.647,89.552 107.842,89.44 108.023,89.353 108.187,89.291 108.334,89.256 108.461,89.248 108.568,89.267 v1(108.653,89.314) ; v1(103.405,106.683) 103.366,106.721 103.341,106.791 103.331,106.89 103.333,107.019 103.347,107.177 103.371,107.362 103.403,107.573 103.444,107.808 103.49,108.065 103.541,108.342 103.595,108.636 103.65,108.943 103.704,109.262 103.758,109.588 103.808,109.919 103.853,110.251 103.893,110.581 103.926,110.905 103.951,111.221 103.968,111.524 103.975,111.811 103.972,112.08 103.958,112.328 103.933,112.551 103.898,112.749 103.851,112.918 103.793,113.057 103.725,113.165 103.647,113.24 v1(103.559,113.281) ; v1(103.514,123.691) 103.666,123.65 103.813,123.573 103.952,123.462 104.085,123.316 104.21,123.138 104.327,122.929 104.437,122.692 104.538,122.429 104.631,122.142 104.716,121.834 104.793,121.509 104.863,121.17 104.927,120.821 104.984,120.464 105.036,120.104 105.083,119.744 105.127,119.388 105.168,119.039 105.208,118.702 105.248,118.378 105.289,118.071 105.332,117.785 105.378,117.522 105.429,117.283 105.485,117.072 105.549,116.891 105.621,116.739 105.702,116.619 105.793,116.532 v1(105.896,116.477) ; v1(103.544,121.321) 103.253,119.568 103.283,119.428 103.313,119.29 103.343,119.155 103.373,119.021 103.402,118.891 103.431,118.763 103.46,118.638 103.489,118.516 103.518,118.397 103.547,118.283 103.576,118.172 103.606,118.065 103.635,117.962 103.665,117.863 103.696,117.769 103.727,117.68 103.759,117.595 103.791,117.515 103.824,117.441 103.858,117.371 103.892,117.307 103.928,117.248 103.964,117.194 104.002,117.146 104.041,117.104 104.08,117.067 104.121,117.035 104.164,117.01 104.207,116.99 v1(104.252,116.976) ; v1(104.085,93.71) 104.138,93.724 104.21,93.711 104.302,93.67 104.412,93.604 104.542,93.513 104.69,93.4 104.857,93.266 105.04,93.113 105.24,92.945 105.454,92.762 105.681,92.569 105.92,92.368 106.169,92.161 106.425,91.952 106.687,91.743 106.951,91.537 107.217,91.338 107.481,91.147 107.742,90.968 107.996,90.802 108.241,90.652 108.476,90.521 108.697,90.409 108.903,90.318 109.092,90.25 109.262,90.206 109.411,90.186 109.538,90.191 109.643,90.222 v1(109.723,90.277) ; v1(104.085,106.29) 104.05,106.333 104.033,106.404 104.033,106.504 104.048,106.632 104.078,106.788 104.122,106.969 104.176,107.176 104.241,107.405 104.314,107.656 104.394,107.926 104.478,108.213 104.565,108.513 104.652,108.824 104.739,109.143 104.824,109.467 104.904,109.792 104.978,110.116 105.045,110.435 105.103,110.746 105.151,111.046 105.188,111.331 105.213,111.599 105.225,111.846 105.224,112.071 105.209,112.272 105.18,112.445 105.138,112.589 105.081,112.703 105.011,112.786 v1(104.928,112.837) ; v1(104.252,83.024) 104.368,83.036 104.492,83.013 104.626,82.959 104.77,82.873 104.924,82.757 105.088,82.613 105.263,82.444 105.448,82.25 105.643,82.036 105.847,81.804 106.059,81.557 106.28,81.298 106.508,81.031 106.743,80.759 106.982,80.486 107.225,80.216 107.471,79.951 107.718,79.696 107.965,79.453 108.209,79.226 108.451,79.017 108.688,78.83 108.918,78.667 109.141,78.531 109.354,78.422 109.557,78.344 109.748,78.297 109.926,78.281 110.091,78.299 v1(110.24,78.349) ; v1(104.72,94.171) 104.771,94.191 104.845,94.185 104.94,94.155 105.057,94.1 105.195,94.024 105.355,93.926 105.534,93.811 105.732,93.678 105.949,93.531 106.181,93.372 106.427,93.204 106.686,93.028 106.954,92.849 107.231,92.667 107.513,92.487 107.798,92.31 108.083,92.14 108.366,91.978 108.643,91.826 108.913,91.688 109.173,91.565 109.42,91.458 109.652,91.37 109.866,91.302 110.061,91.254 110.235,91.228 110.385,91.224 110.511,91.242 110.612,91.283 v1(110.686,91.347) ; v1(104.72,105.829) 104.69,105.875 104.68,105.948 104.691,106.047 104.719,106.173 104.766,106.324 104.828,106.5 104.904,106.7 104.992,106.922 105.091,107.163 105.198,107.424 105.312,107.7 105.429,107.989 105.549,108.289 105.669,108.598 105.787,108.911 105.9,109.226 106.008,109.541 106.108,109.851 106.198,110.154 106.277,110.447 106.344,110.726 106.396,110.99 106.434,111.235 106.457,111.459 106.463,111.66 106.453,111.835 106.425,111.983 106.381,112.103 106.32,112.192 v1(106.242,112.251) ; v1(105.303,94.697) 105.352,94.722 105.426,94.724 105.524,94.703 105.646,94.661 105.791,94.599 105.96,94.519 106.151,94.423 106.362,94.312 106.592,94.188 106.84,94.054 107.102,93.913 107.378,93.765 107.664,93.615 107.958,93.463 108.257,93.313 108.559,93.167 108.86,93.028 109.158,92.896 109.45,92.775 109.733,92.665 110.005,92.57 110.261,92.49 110.501,92.426 110.722,92.381 110.92,92.353 111.096,92.346 111.246,92.357 111.369,92.389 111.465,92.44 v1(111.532,92.511) ; v1(105.303,105.303) 105.278,105.352 105.276,105.426 105.297,105.524 105.339,105.646 105.401,105.791 105.481,105.96 105.577,106.151 105.688,106.362 105.812,106.592 105.946,106.84 106.087,107.102 106.235,107.378 106.385,107.664 106.537,107.958 106.687,108.257 106.833,108.559 106.972,108.86 107.104,109.158 107.225,109.45 107.335,109.733 107.43,110.005 107.51,110.261 107.574,110.501 107.619,110.722 107.647,110.92 107.654,111.096 107.643,111.246 107.611,111.369 107.56,111.465 v1(107.489,111.532) ; v1(105.819,123.232) 105.967,123.177 106.105,123.086 106.233,122.961 106.351,122.803 106.458,122.614 106.554,122.395 106.639,122.148 106.714,121.876 106.779,121.581 106.833,121.267 106.878,120.936 106.915,120.592 106.944,120.237 106.966,119.877 106.982,119.513 106.994,119.151 107.003,118.792 107.01,118.441 107.016,118.101 107.024,117.775 107.035,117.466 107.049,117.177 107.069,116.91 107.097,116.668 107.132,116.453 107.178,116.265 107.235,116.108 107.304,115.98 107.386,115.884 v1(107.482,115.82) ; v1(105.829,95.28) 105.875,95.31 105.948,95.32 106.047,95.309 106.173,95.281 106.324,95.234 106.5,95.172 106.7,95.096 106.922,95.008 107.163,94.909 107.424,94.802 107.7,94.688 107.989,94.571 108.289,94.451 108.598,94.331 108.911,94.213 109.226,94.1 109.541,93.992 109.851,93.892 110.154,93.802 110.447,93.723 110.726,93.656 110.99,93.604 111.235,93.566 111.459,93.543 111.66,93.537 111.835,93.547 111.983,93.575 112.103,93.619 112.192,93.68 v1(112.251,93.758) ; v1(105.829,104.72) 105.809,104.771 105.815,104.845 105.845,104.94 105.9,105.057 105.976,105.195 106.074,105.355 106.189,105.534 106.322,105.732 106.469,105.949 106.628,106.181 106.796,106.427 106.972,106.686 107.151,106.954 107.333,107.231 107.513,107.513 107.69,107.798 107.86,108.083 108.022,108.366 108.174,108.643 108.312,108.913 108.435,109.173 108.542,109.42 108.63,109.652 108.698,109.866 108.746,110.061 108.772,110.235 108.776,110.385 108.758,110.511 108.717,110.612 v1(108.653,110.686) ; v1(105.896,83.523) 106.009,83.545 106.135,83.536 106.274,83.494 106.426,83.423 106.59,83.323 106.768,83.196 106.959,83.044 107.161,82.87 107.376,82.675 107.602,82.464 107.838,82.239 108.083,82.004 108.336,81.76 108.596,81.513 108.861,81.265 109.13,81.019 109.4,80.78 109.671,80.55 109.94,80.332 110.206,80.13 110.467,79.947 110.721,79.784 110.966,79.644 111.201,79.53 111.424,79.443 111.634,79.385 111.829,79.357 112.007,79.359 112.169,79.392 v1(112.313,79.457) ; v1(106.29,95.915) 106.333,95.95 106.404,95.967 106.504,95.967 106.632,95.952 106.788,95.922 106.969,95.878 107.176,95.824 107.405,95.759 107.656,95.686 107.926,95.606 108.213,95.522 108.513,95.435 108.824,95.348 109.143,95.261 109.467,95.176 109.792,95.096 110.116,95.022 110.435,94.955 110.746,94.897 111.046,94.849 111.331,94.812 111.599,94.787 111.846,94.775 112.071,94.776 112.272,94.791 112.445,94.82 112.589,94.862 112.703,94.919 112.786,94.989 v1(112.837,95.072) ; v1(106.29,104.085) 106.276,104.138 106.289,104.21 106.33,104.302 106.396,104.412 106.487,104.542 106.6,104.69 106.734,104.857 106.887,105.04 107.055,105.24 107.238,105.454 107.431,105.681 107.632,105.92 107.839,106.169 108.048,106.425 108.257,106.687 108.463,106.951 108.662,107.217 108.853,107.481 109.032,107.742 109.198,107.996 109.348,108.241 109.479,108.476 109.591,108.697 109.682,108.903 109.75,109.092 109.794,109.262 109.814,109.411 109.809,109.538 109.778,109.643 v1(109.723,109.723) ; v1(106.683,96.595) 106.721,96.634 106.791,96.659 106.89,96.669 107.019,96.667 107.177,96.653 107.362,96.629 107.573,96.597 107.808,96.556 108.065,96.51 108.342,96.459 108.636,96.405 108.943,96.35 109.262,96.296 109.588,96.242 109.919,96.192 110.251,96.147 110.581,96.107 110.905,96.074 111.221,96.049 111.524,96.032 111.811,96.025 112.08,96.028 112.328,96.042 112.551,96.067 112.749,96.102 112.918,96.149 113.057,96.207 113.165,96.275 113.24,96.353 v1(113.281,96.441) ; v1(106.683,103.405) 106.674,103.459 106.695,103.53 106.745,103.616 106.822,103.72 106.926,103.839 107.054,103.975 107.205,104.126 107.376,104.293 107.564,104.474 107.768,104.668 107.984,104.873 108.209,105.09 108.441,105.316 108.676,105.548 108.911,105.787 109.143,106.029 109.369,106.272 109.586,106.515 109.792,106.755 109.983,106.99 110.158,107.219 110.314,107.438 110.448,107.647 110.56,107.842 110.647,108.023 110.709,108.187 110.744,108.334 110.752,108.461 110.733,108.568 v1(110.686,108.653) ; v1(107.002,97.312) 107.036,97.355 107.103,97.387 107.201,97.408 107.329,97.419 107.487,97.422 107.674,97.417 107.887,97.407 108.125,97.391 108.386,97.372 108.667,97.35 108.964,97.328 109.276,97.305 109.598,97.284 109.929,97.265 110.263,97.25 110.598,97.239 110.93,97.234 111.256,97.235 111.572,97.243 111.875,97.258 112.162,97.282 112.429,97.313 112.674,97.352 112.894,97.4 113.086,97.456 113.25,97.52 113.382,97.592 113.482,97.671 113.548,97.757 v1(113.581,97.849) ; v1(107.002,102.688) 106.999,102.743 107.027,102.811 107.086,102.892 107.174,102.986 107.289,103.094 107.431,103.216 107.597,103.351 107.784,103.498 107.991,103.658 108.213,103.83 108.45,104.012 108.696,104.204 108.95,104.404 109.208,104.611 109.467,104.824 109.723,105.04 109.973,105.258 110.215,105.477 110.445,105.695 110.659,105.909 110.857,106.118 111.035,106.32 111.19,106.513 111.321,106.696 111.427,106.866 111.506,107.023 111.556,107.165 111.577,107.291 111.569,107.399 v1(111.532,107.489) ; v1(107.244,98.059) 107.274,98.105 107.337,98.143 107.432,98.175 107.559,98.199 107.716,98.219 107.902,98.234 108.115,98.245 108.354,98.255 108.615,98.263 108.896,98.271 109.194,98.279 109.507,98.289 109.83,98.302 110.16,98.318 110.494,98.338 110.829,98.362 111.159,98.392 111.483,98.427 111.797,98.468 112.097,98.515 112.379,98.568 112.642,98.627 112.881,98.692 113.095,98.762 113.281,98.838 113.436,98.919 113.561,99.004 113.652,99.093 113.709,99.186 v1(113.731,99.28)